# EAGLE board Skaarhoj BI8-SE-C30RGB (EAGLE 6.2), part 1 of 2
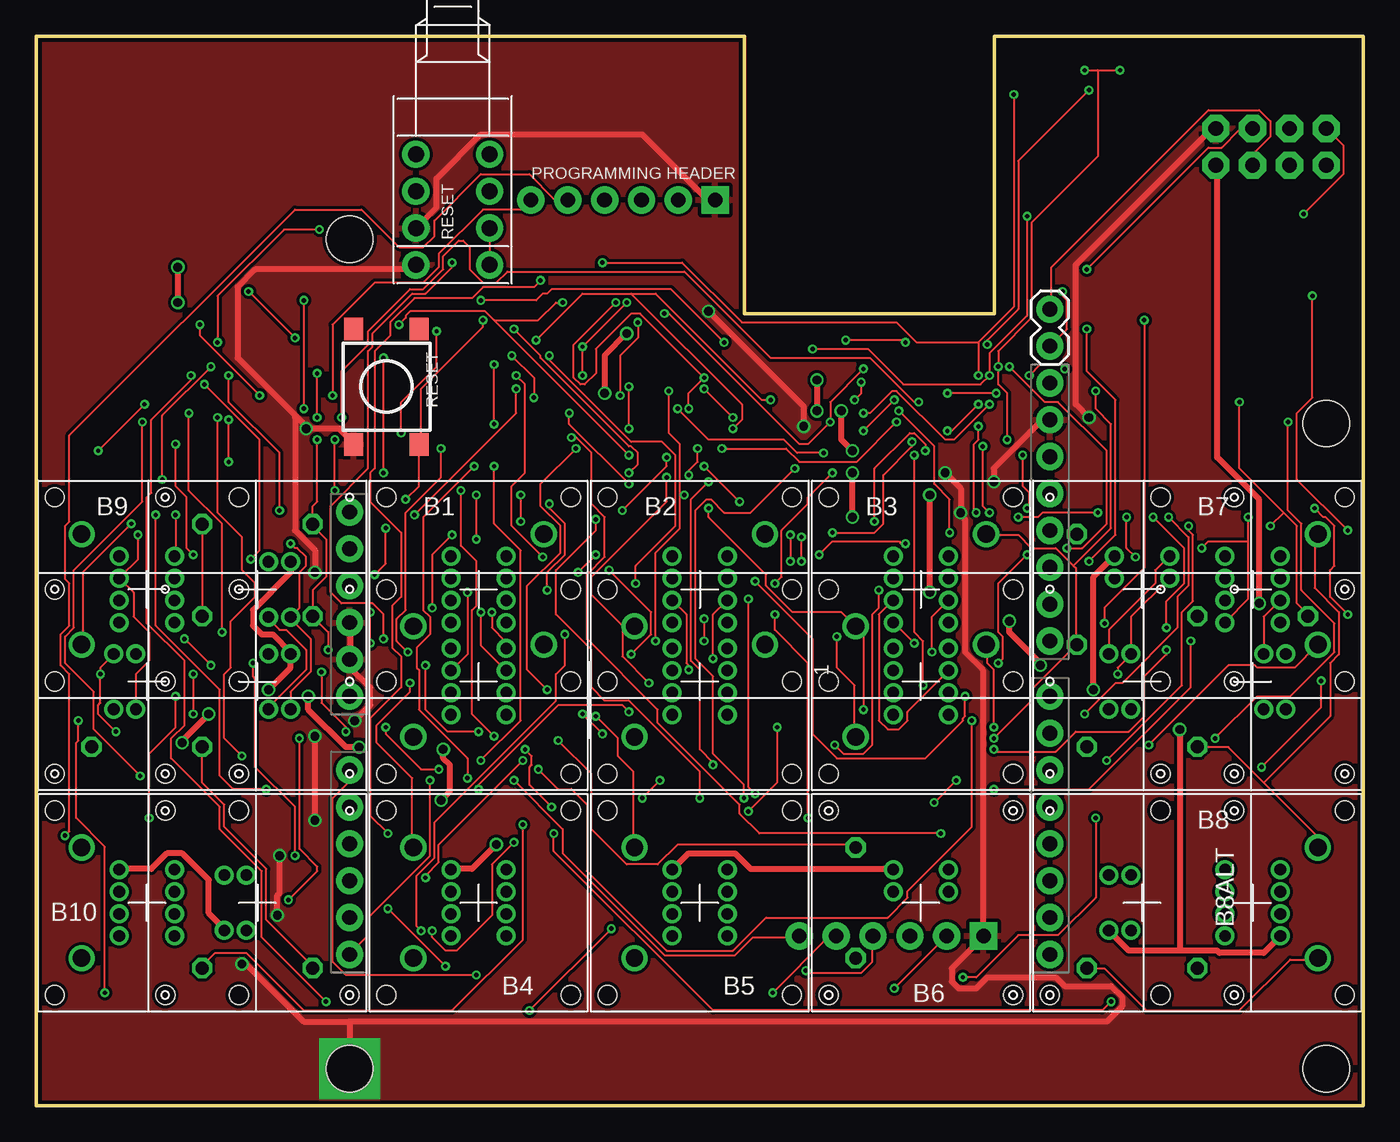
[diagram p0: board, top side]
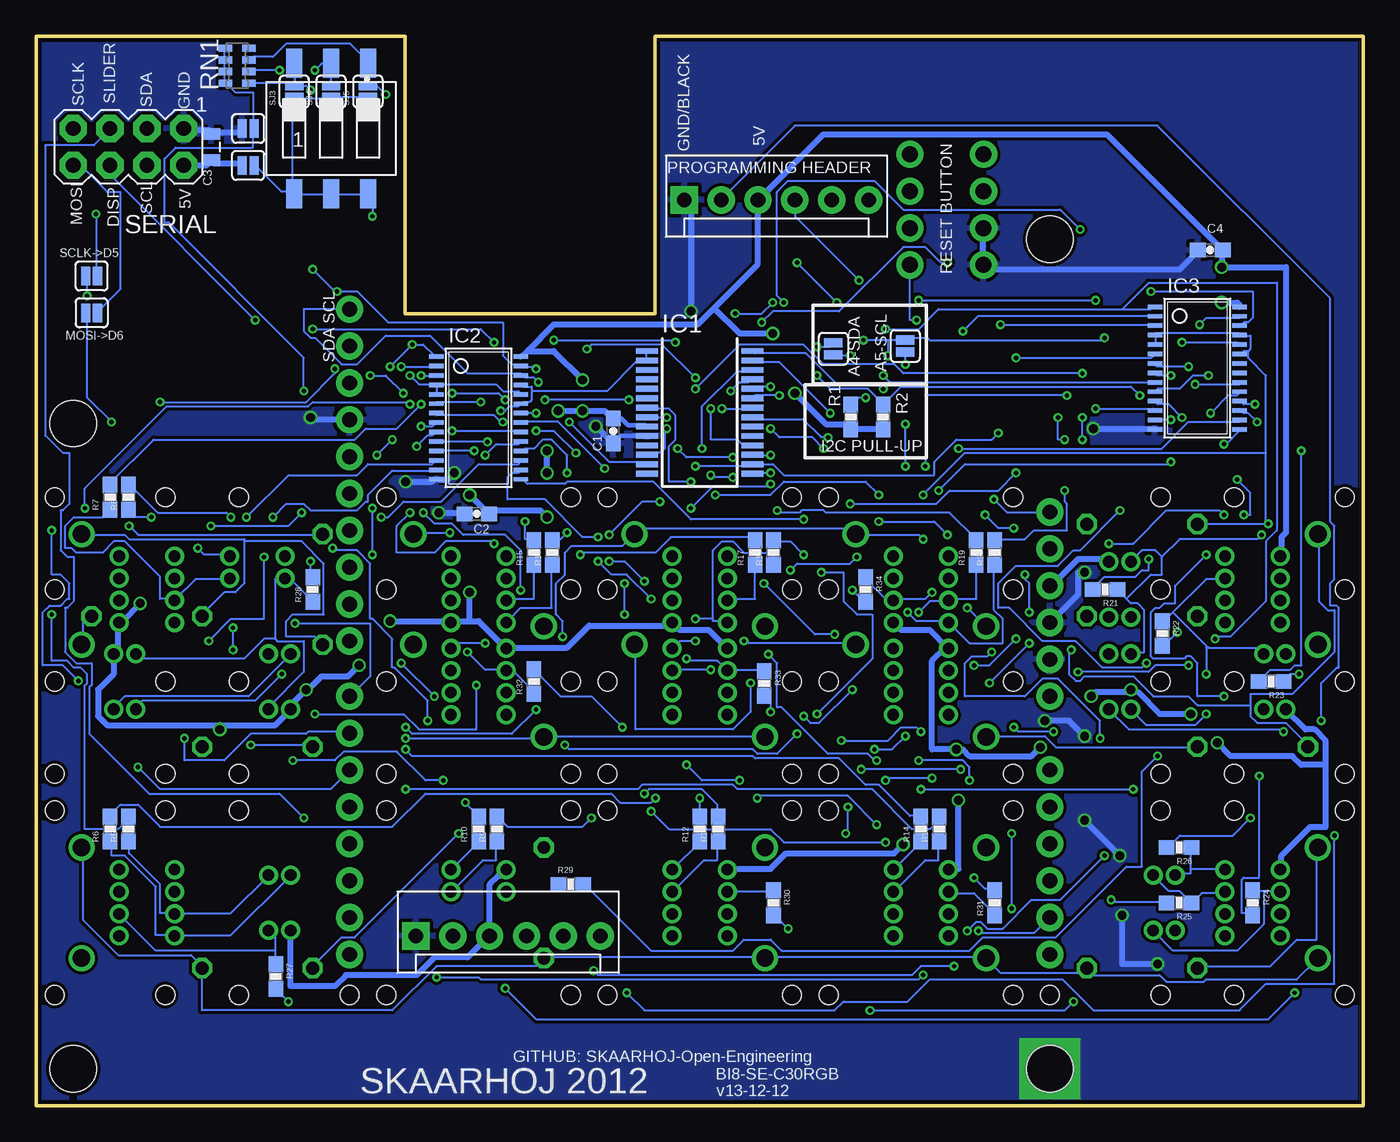
[diagram p1: board, bottom side, seen from below]

Size 91.44 x 73.66 mm. Coordinates in mm from the lower left corner, seen from the top.
Outline: 66.04,73.66 66.04,54.56 48.82,54.56 48.82,73.66 0,73.66 0,0 91.44,0 91.44,73.66 66.04,73.66
Copper layers (1*16): Top 0.035mm / dielectric 1.5mm / Bottom 0.035mm
Design rules: minimum track width 6mil, minimum drill 12mil, track to track 6mil, track to pad 6mil, pad to pad 6mil, via to via 6mil, smd to smd 0mil, copper to edge 10mil, drill to drill 10mil, minimum pad ring 10mil, minimum via ring 6mil, stop-mask expansion 2mil, vias tented up to drill 100mil, thermal gap 10mil
Net classes: 0 default: width 0.152 mm, drill 0.254 mm, clearance 0.152 mm; 1 Power: width 0.406 mm, drill 0.61 mm, clearance 0.203 mm
Holes 3.2 mm at 21.59,59.69 21.59,2.54 88.9,2.54 88.9,46.99
Holes 1.3 mm at 90.17,35.56 82.55,41.91 82.55,29.21 90.17,22.86 82.55,22.86 77.47,22.86 82.55,20.32 82.55,7.62 69.85,7.62 67.31,7.62 67.31,20.32 54.61,7.62 54.61,20.32 8.89,41.91 1.27,35.56 1.27,22.86 8.89,22.86 13.97,22.86 8.89,20.32 8.89,29.21 13.97,35.56 21.59,7.62 8.89,7.62
tRestrict: area 48.6,54.1 to 66.3,73.7
bRestrict: area 48.6,54.1 to 66.3,73.7

## Footprints (pad centres in the part's own frame; a part is rotated, then mirrored left to right if it is on the bottom)
NKK-KP01 = drill 0.8: B(-) 1.905,-0.762; COM(+) 1.905,-2.286; G(-) -1.905,-2.286; P$3 1.905,0.762; P$4 1.905,2.286; P$7 -1.905,0.762; P$8 -1.905,2.286; R(-) -1.905,-0.762 | drill 1.2: P$1 4.496,3.81; P$1A 4.496,-3.81 | hole 1.3: -6.35,6.35; 6.35,6.35; 6.35,-6.35; -6.35,-6.35
NKK-KP01_LESSHOLES = drill 0.8: B(-) 1.905,-0.762; COM(+) 1.905,-2.286; G(-) -1.905,-2.286; R(-) -1.905,-0.762 | drill 0.889 octagon: P$1 4.496,3.81; P$1A 4.496,-3.81
0603-CAP = smd 1.1 x 1: 1 -0.85,0; 2 0.85,0
0805 = smd 0.8 x 1.2: 1 -0.9,0; 2 0.9,0
SSOP28 = smd 0.4 x 1.5: 1 -4.225,-3.625; 2 -3.575,-3.625; 3 -2.925,-3.625; 4 -2.275,-3.625; 5 -1.625,-3.625; 6 -0.975,-3.625; 7 -0.325,-3.625; 8 0.325,-3.625; 9 0.975,-3.625; 10 1.625,-3.625; 11 2.275,-3.625; 12 2.925,-3.625; 13 3.575,-3.625; 14 4.225,-3.625; 15 4.225,3.625; 16 3.575,3.625; 17 2.925,3.625; 18 2.275,3.625; 19 1.625,3.625; 20 0.975,3.625; 21 0.325,3.625; 22 -0.325,3.625; 23 -0.975,3.625; 24 -1.625,3.625; 25 -2.275,3.625; 26 -2.925,3.625; 27 -3.575,3.625; 28 -4.225,3.625
TSSOP28 = smd 0.305 x 0.991: 1 -4.225,-2.918; 2 -3.575,-2.918; 3 -2.925,-2.918; 4 -2.275,-2.918; 5 -1.625,-2.918; 6 -0.975,-2.918; 7 -0.325,-2.918; 8 0.325,-2.918; 9 0.975,-2.918; 10 1.625,-2.918; 11 2.275,-2.918; 12 2.925,-2.918; 13 3.575,-2.918; 14 4.225,-2.918; 15 4.225,2.918; 16 3.575,2.918; 17 2.925,2.918; 18 2.275,2.918; 19 1.625,2.918; 20 0.975,2.918; 21 0.325,2.918; 22 -0.325,2.918; 23 -0.975,2.918; 24 -1.625,2.918; 25 -2.275,2.918; 26 -2.925,2.918; 27 -3.575,2.918; 28 -4.225,2.918
MOLEX-1X6 = drill 1.016 pad 1.88 square: 1 0,0 | drill 1.016 pad 1.88: 2 2.54,0; 3 5.08,0; 4 7.62,0; 5 10.16,0; 6 12.7,0
1X02 = drill 1.016 pad 1.88: 1 0,0; 2 2.54,0
SJ_2S = smd 0.635 x 1.27: 1 -0.412,0; 2 0.412,0
0603-RES = smd 1.1 x 1: 1 -0.85,0; 2 0.85,0
CAY16_HAND = smd 0.5 x 0.904: 1 -1.2,-0.813; 2 -0.4,-0.813; 3 0.4,-0.813; 4 1.2,-0.813; 5 1.2,0.813; 6 0.4,0.813; 7 -0.4,0.813; 8 -1.2,0.813
PUSHBUTTON = drill 1.1 pad 1.88: 1 2.54,2.54; 2 2.54,-2.54; 3 -2.54,2.54; 4 -2.54,-2.54
SMS-003 = smd 1.092 x 2.007: 1 -2.54,-4.496; 2 0,-4.496; 3 2.54,-4.496; 4 2.54,4.496; 5 0,4.496; 6 -2.54,4.496
TACTILE_SWITCH_TALL = smd 1.55 x 1.3: A1 -3.975,-2.25; A2 3.975,-2.25; B1 -3.975,2.25; B2 3.975,2.25
2X4 = drill 1.016 pad 1.88 octagon: 1 -3.81,-1.27; 2 -3.81,1.27; 3 -1.27,-1.27; 4 -1.27,1.27; 5 1.27,-1.27; 6 1.27,1.27; 7 3.81,-1.27; 8 3.81,1.27
DUEMILANOVE_VIAS = drill 1.016 pad 1.88: 3.3V 50.8,13.97; 5V 50.8,16.51; A0 50.8,29.21; A1 50.8,31.75; A2 50.8,34.29; A3 50.8,36.83; A4 50.8,39.37; A5 50.8,41.91; AREF 2.54,2.54; D2 2.54,36.83; D3 2.54,34.29; D4 2.54,31.75; D5 2.54,29.21; D6 2.54,26.67; D7 2.54,24.13; D8 2.54,20.32; D9 2.54,17.78; D10 2.54,15.24; D11 2.54,12.7; D12 2.54,10.16; D13 2.54,7.62; GND@0 50.8,19.05; GND@1 50.8,21.59; GND@2 2.54,5.08; RES 50.8,11.43; RX 2.54,41.91; TX 2.54,39.37; VIN 50.8,24.13

## Placement (x,y rotation side)
B1  KP01-RGB  [NKK-KP01]  30.48,35.56 0 top
B1ALT  KP01-RGB  [NKK-KP01]  30.48,29.21 180 top
B2  KP01-RGB  [NKK-KP01]  45.72,35.56 0 top
B2ALT  KP01-RGB  [NKK-KP01]  45.72,29.21 180 top
B3  KP01-RGB  [NKK-KP01]  60.96,35.56 0 top
B3ALT  KP01-RGB  [NKK-KP01]  60.96,29.21 180 top
B4  KP01-RGB  [NKK-KP01]  30.48,13.97 180 top
B5  KP01-RGB  [NKK-KP01]  45.72,13.97 180 top
B6  KP01-RGB  [NKK-KP01_LESSHOLES]  60.96,13.97 180 top
B7  KP01-RGB  [NKK-KP01]  83.82,35.56 0 top
B7ALT  KP01-RGB  [NKK-KP01_LESSHOLES]  83.82,29.21 90 top
B7ALT1  KP01-RGB  [NKK-KP01_LESSHOLES]  76.2,35.56 180 top
B7ALT2  KP01-RGB  [NKK-KP01_LESSHOLES]  76.2,29.21 270 top
B8  KP01-RGB  [NKK-KP01]  83.82,13.97 0 top
B8ALT  KP01-RGB  [NKK-KP01_LESSHOLES]  76.2,13.97 270 top
B9  KP01-RGB  [NKK-KP01]  7.62,35.56 180 top
B9ALT  KP01-RGB  [NKK-KP01_LESSHOLES]  7.62,29.21 270 top
B9ALT1  KP01-RGB  [NKK-KP01_LESSHOLES]  15.24,35.56 90 top
B9ALT2  KP01-RGB  [NKK-KP01_LESSHOLES]  15.24,29.21 90 top
B10  KP01-RGB  [NKK-KP01]  7.62,13.97 180 top
B10ALT  KP01-RGB  [NKK-KP01_LESSHOLES]  15.24,13.97 270 top
C1  100nF  [0603-CAP]  51.69,46.48 90 bottom
C2  100nF  [0603-CAP]  61.09,40.77 180 bottom
C3  10uF  [0805]  79.38,66.04 90 bottom
C4  100nF  [0603-CAP]  10.54,58.93 180 bottom
IC1  MCP23017SS  [SSOP28]  45.72,47.75 270 bottom
IC2  PCA9685  [TSSOP28]  60.96,47.37 270 bottom
IC3  PCA9685  [TSSOP28]  11.43,50.8 270 bottom
JP1  [MOLEX-1X6]  65.28,11.68 0 bottom
JP2  [MOLEX-1X6]  46.79,62.39 0 bottom
JP3  [1X02]  69.85,52.32 90 top
MOSI->D6  SOLDERJUMPERNC  [SJ_2S]  87.63,54.61 180 bottom
R1  1K5  [0603-RES]  35.31,47.43 270 bottom
R2  1K5  [0603-RES]  33.08,47.43 270 bottom
R5  270  [0603-RES]  85.09,19.05 90 bottom
R6  270  [0603-RES]  86.36,19.05 90 bottom
R7  270  [0603-RES]  86.36,41.91 90 bottom
R8  270  [0603-RES]  85.09,41.91 90 bottom
R9  270  [0603-RES]  59.69,19.05 90 bottom
R10  270  [0603-RES]  60.96,19.05 90 bottom
R11  270  [0603-RES]  44.45,19.05 90 bottom
R12  270  [0603-RES]  45.72,19.05 90 bottom
R13  270  [0603-RES]  29.21,19.05 90 bottom
R14  270  [0603-RES]  30.48,19.05 90 bottom
R15  270  [0603-RES]  57.15,38.1 90 bottom
R16  270  [0603-RES]  55.88,38.1 90 bottom
R17  270  [0603-RES]  41.91,38.1 90 bottom
R18  270  [0603-RES]  40.64,38.1 90 bottom
R19  270  [0603-RES]  26.67,38.1 90 bottom
R20  270  [0603-RES]  25.4,38.1 90 bottom
R21  270  [0603-RES]  17.78,35.56 180 bottom
R22  270  [0603-RES]  13.84,32.51 270 bottom
R23  270  [0603-RES]  6.35,29.21 180 bottom
R24  270  [0603-RES]  7.62,13.97 270 bottom
R25  270  [0603-RES]  12.7,13.97 180 bottom
R26  270  [0603-RES]  12.7,17.78 180 bottom
R27  270  [0603-RES]  74.93,8.89 270 bottom
R28  270  [0603-RES]  72.39,35.56 90 bottom
R29  270  [0603-RES]  54.61,15.24 0 bottom
R30  270  [0603-RES]  40.64,13.97 270 bottom
R31  270  [0603-RES]  25.4,13.97 90 bottom
R32  270  [0603-RES]  57.15,29.21 90 bottom
R33  270  [0603-RES]  41.27,29.08 270 bottom
R34  270  [0603-RES]  34.29,35.56 270 bottom
RN1  10K  [CAY16_HAND]  77.6,71.63 270 bottom
S1  [PUSHBUTTON]  28.7,60.45 180 top
S2  [PUSHBUTTON]  28.7,62.99 180 top
S3  SWS003  [SMS-003]  71.12,67.31 0 bottom
S3->A2  SOLDERJUMPERNC  [SJ_2S]  31.56,52.32 270 bottom
S3->A3  SOLDERJUMPERNC  [SJ_2S]  36.51,52.13 270 bottom
S4  SWITCH-MOMENTARY-2  [TACTILE_SWITCH_TALL]  24.13,49.53 270 top
SCLK->D5  SOLDERJUMPERNC  [SJ_2S]  87.63,57.15 0 bottom
SERIAL  M04X2  [2X4]  85.09,66.04 180 bottom
SJ1  SOLDERJUMPERNC  [SJ_2S]  76.83,64.77 0 bottom
SJ2  SOLDERJUMPERNC  [SJ_2S]  76.83,67.31 0 bottom
SJ3  SOLDERJUMPERNC  [SJ_2S]  73.66,69.85 90 bottom
SJ4  SOLDERJUMPERNC  [SJ_2S]  71.12,69.85 90 bottom
SJ5  SOLDERJUMPERNC  [SJ_2S]  68.58,69.85 90 bottom
U1  ARDUINO_SHIELDNO_SILK  [DUEMILANOVE_VIAS]  72.39,52.32 180 top

## Library data of the parts
B1 B1ALT B2 B2ALT B3 B3ALT B4-B7 B7ALT B7ALT1 B7ALT2 B8 B8ALT B9 B9ALT B9ALT1 B9ALT2 B10 B10ALT S1 S2 = SKAARHOJ
C1-C4 JP1-JP3 MOSI->D6 R1 R2 R5-R34 S3->A2 S3->A3 S4 SCLK->D5 SERIAL SJ1-SJ5 U1 = SparkFun
IC1 = microchip; MF: MICROCHIP; MPN: MCP23017-E/SS; OC_FARNELL: 1467674; OC_NEWARK: 31K2960
IC2 IC3 = wsmith
RN1 = SKAARHOJ; OC_FARNELL: unknown; OC_NEWARK: unknown
S3 = smd-special

## Nets
5V [Power]: B1.COM(+) B1ALT.COM(+) B2.COM(+) B2ALT.COM(+) B3.COM(+) B3ALT.COM(+) B4.COM(+) B5.COM(+) B6.COM(+) B7.COM(+) B7ALT1.COM(+) B7ALT2.COM(+) B7ALT.COM(+) B8.COM(+) B8ALT.COM(+) B9.COM(+) B9ALT1.COM(+) B9ALT2.COM(+) B9ALT.COM(+) B10.COM(+) B10ALT.COM(+) C1.2 C2.1 C3.1 C4.1 IC1.9 IC2.28 IC3.28 JP1.3 JP2.3 R1.2 R2.2 SERIAL.2 SJ1.1 U1.5V
5VL: IC1.18 IC2.4 IC2.5 IC2.24 IC3.24 S3.1 S3.2 S3.3 SJ1.2 SJ3.1 SJ4.1 SJ5.1
A0: IC1.15 IC2.1 IC3.1 RN1.5 S3.6 SJ3.2
A1: IC1.16 IC2.2 IC3.2 RN1.6 S3.5 SJ4.2
A2: IC1.17 IC2.3 IC3.3 RN1.7 S3.4 SJ5.2
ANALOG4: S3->A3.2 U1.A4
ANALOG5: S3->A2.2 U1.A5
D2: U1.D2
D3: U1.D3
D5: SCLK->D5.1 U1.D5
D6: MOSI->D6.2 U1.D6
D7: SERIAL.6 U1.D7
D8: U1.D8
D9: U1.D9
GND [Power]: C1.1 C2.2 C3.2 C4.2 IC1.10 IC2.14 IC3.14 JP1.1 JP2.1 S1.1 S2.1 S4.A2 SERIAL.1 SJ2.1 U1.GND@0 U1.GND@1 U1.GND@2
GNDL: B1.P$1 B1ALT.P$1 B2.P$1 B2ALT.P$1 B3.P$1 B3ALT.P$1 B4.P$1 B5.P$1 B6.P$1 B7.P$1 B7ALT1.P$1 B7ALT2.P$1 B7ALT.P$1 B8.P$1 B8ALT.P$1 B9.P$1 B9ALT1.P$1 B9ALT2.P$1 B9ALT.P$1 B10.P$1 B10ALT.P$1 IC1.1 IC1.2 IC2.23 IC2.25 IC3.4 IC3.5 IC3.23 IC3.25 RN1.1 RN1.2 RN1.3 RN1.4 SJ2.2
GPA0: B8.P$1A B8ALT.P$1A IC1.21
GPA1: B7.P$1A B7ALT1.P$1A B7ALT2.P$1A B7ALT.P$1A IC1.22
GPA2: B6.P$1A IC1.23
GPA3: B5.P$1A IC1.24
GPA4: B1.P$1A B1ALT.P$1A IC1.25
GPA5: B2.P$1A B2ALT.P$1A IC1.26
GPA6: B3.P$1A B3ALT.P$1A IC1.27
GPA7: B4.P$1A IC1.28
GPA8: B9.P$1A B9ALT1.P$1A B9ALT2.P$1A B9ALT.P$1A IC1.8
GPA9: B10.P$1A B10ALT.P$1A IC1.7
GPA10: IC1.6
I2C_SCL: IC1.12 IC2.26 IC3.26 JP3.2 R1.1 S3->A2.1 SERIAL.4
I2C_SDA: IC1.13 IC2.27 IC3.27 JP3.1 R2.1 S3->A3.1 SERIAL.3
L0: B1.G(-) B1ALT.G(-) R20.1
L0B: B1.B(-) B1ALT.B(-) R34.1
L1: B1.R(-) B1ALT.R(-) R19.1
L1B: B2.B(-) B2ALT.B(-) R33.1
L2: B2.G(-) B2ALT.G(-) R18.1
L2B: B3.B(-) B3ALT.B(-) R32.1
L3: B2.R(-) B2ALT.R(-) R17.1
L3B: B4.B(-) R31.1
L4: B3.G(-) B3ALT.G(-) R16.1
L4B: B5.B(-) R30.1
L5: B3.R(-) B3ALT.R(-) R15.1
L5B: B6.B(-) R29.1
L6: B4.G(-) R14.1
L6B: B7.B(-) B7ALT1.B(-) B7ALT2.B(-) B7ALT.B(-) R28.1
L7: B4.R(-) R13.1
L7B: B8.B(-) B8ALT.B(-) R27.1
L8: B5.G(-) R12.1
L8G: B10.G(-) B10ALT.G(-) R26.1
L9: B5.R(-) R11.1
L9R: B10.R(-) B10ALT.R(-) R25.1
L10: B6.G(-) R10.1
L10B: B10.B(-) B10ALT.B(-) R24.1
L11: B6.R(-) R9.1
L11G: B9.G(-) B9ALT1.G(-) B9ALT2.G(-) B9ALT.G(-) R23.1
L12: B7.G(-) B7ALT1.G(-) B7ALT2.G(-) B7ALT.G(-) R8.1
L12R: B9.R(-) B9ALT1.R(-) B9ALT2.R(-) B9ALT.R(-) R22.1
L13: B7.R(-) B7ALT1.R(-) B7ALT2.R(-) B7ALT.R(-) R7.1
L13B: B9.B(-) B9ALT1.B(-) B9ALT2.B(-) B9ALT.B(-) R21.1
L14: B8.G(-) B8ALT.G(-) R6.1
L15: B8.R(-) B8ALT.R(-) R5.1
MOSI: MOSI->D6.1 SERIAL.8
N$1: JP1.2 JP2.2
N$2: IC3.13 R27.2
N$3: IC3.12 R28.2
N$4: IC2.13 R13.2
N$5: IC2.12 R14.2
N$6: IC3.11 R29.2
N$7: IC2.11 R15.2
N$9: IC2.10 R16.2
N$10: IC2.9 R17.2
N$11: IC2.8 R18.2
N$12: IC2.7 R19.2
N$13: IC3.10 R30.2
N$14: IC3.9 R31.2
N$15: IC3.8 R32.2
N$16: IC3.7 R33.2
N$17: IC3.6 R34.2
N$18: IC3.15 R26.2
N$19: IC2.6 R20.2
N$20: IC2.15 R12.2
N$21: IC2.16 R11.2
N$22: IC2.17 R10.2
N$23: IC2.18 R9.2
N$24: IC2.19 R8.2
N$25: IC2.20 R7.2
N$26: IC2.21 R6.2
N$27: IC2.22 R5.2
N$28: IC3.16 R25.2
N$29: IC3.17 R24.2
N$30: IC3.18 R23.2
N$31: IC3.19 R22.2
N$32: IC3.20 R21.2
N$33: JP1.4 JP2.4
N$34: JP1.5 JP2.5
N$45: JP1.6 JP2.6
RESET: S1.3 S2.3 S4.B2 U1.RES
SCLK: SCLK->D5.2 SERIAL.7
SLIDER_IN: SERIAL.5 U1.A0
VIN [Power]: U1.VIN